# EAGLE board cmoy-wide (EAGLE 6.4)
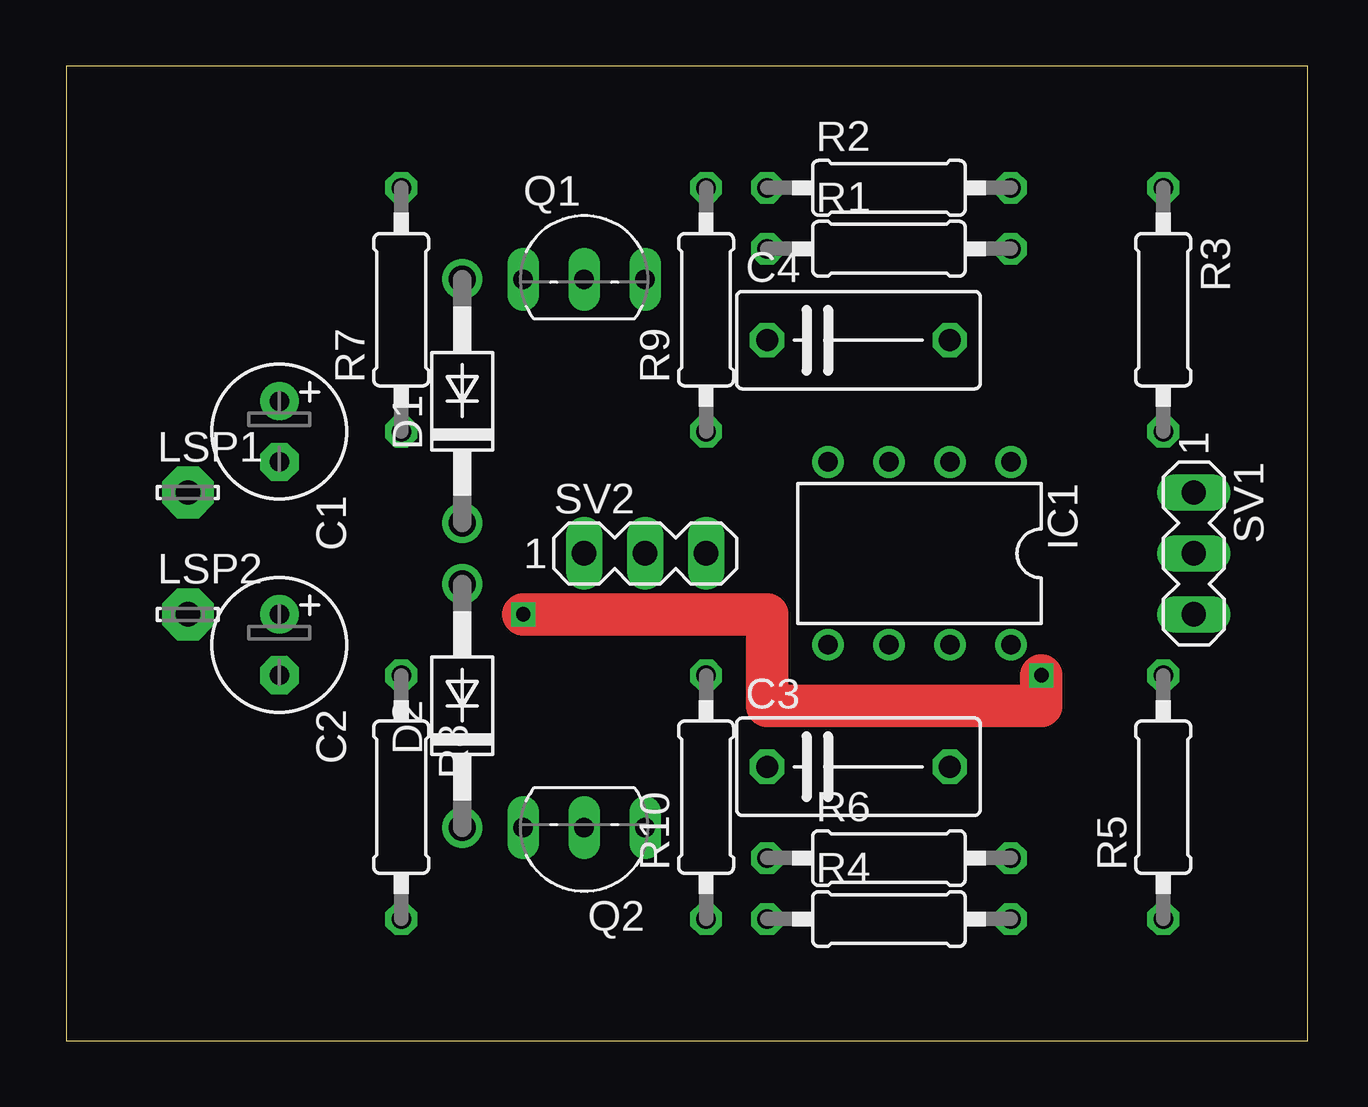
[diagram p0: board, top side]
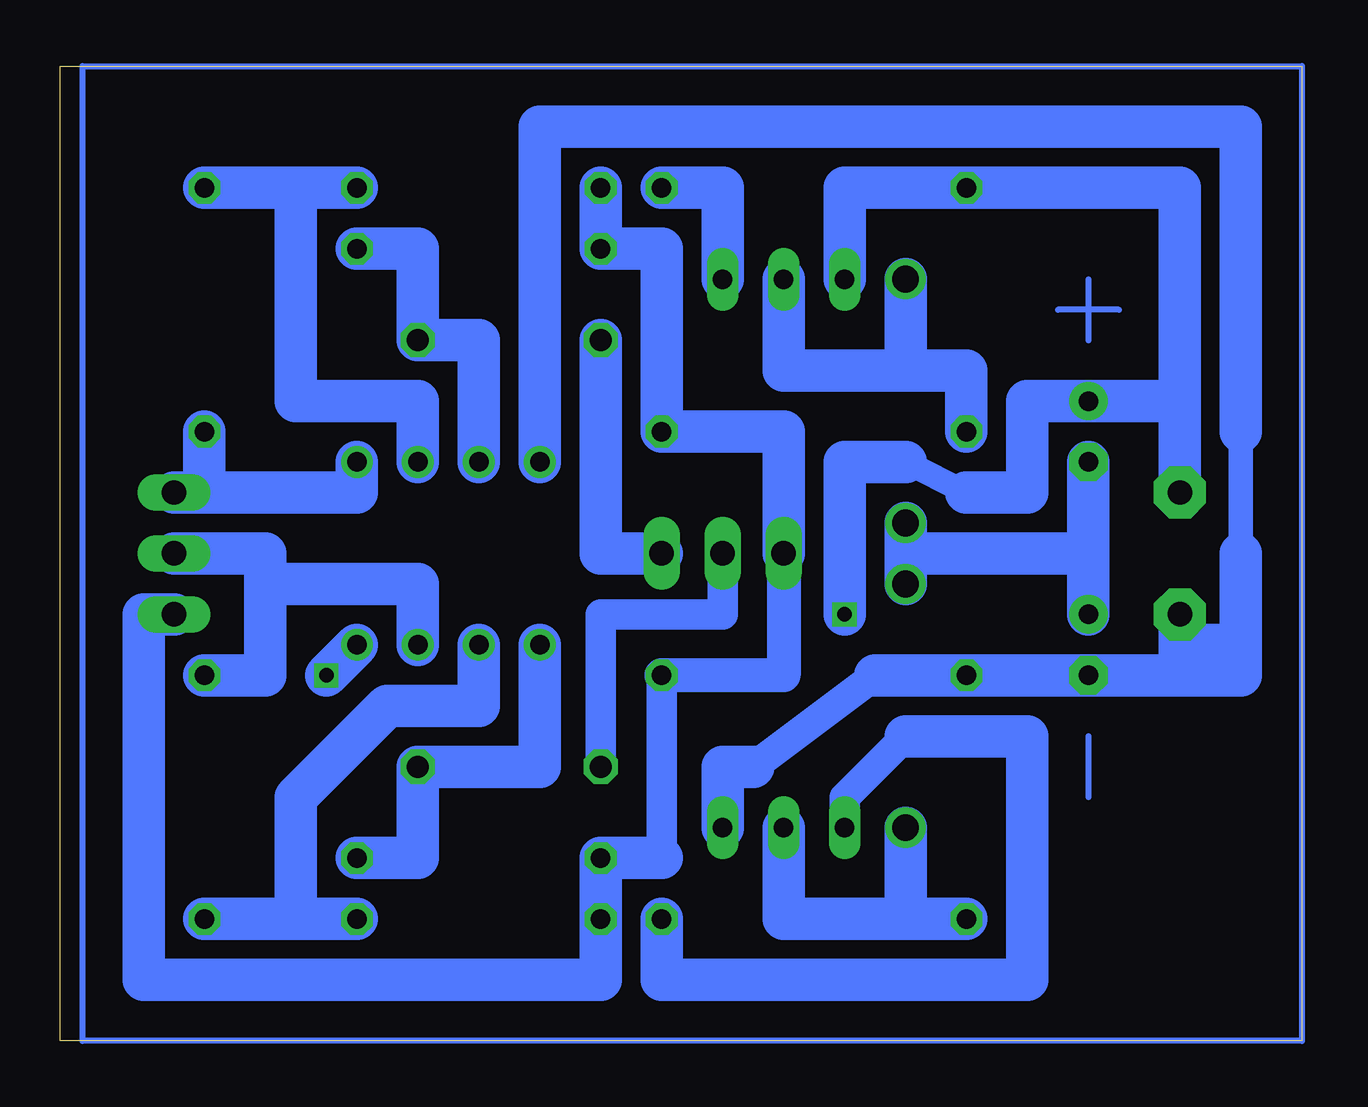
[diagram p1: board, bottom side, seen from below]

Size 51.74 x 40.63 mm. Coordinates in mm from the lower left corner, seen from the top.
Outline: 0,0 51.74,0 51.74,40.63 0,40.63 0,0
Copper layers (1*16): Top 0.035mm / dielectric 1.5mm / Bottom 0.035mm
Design rules "default *": minimum track width 10mil, minimum drill 24mil, track to track 8mil, track to pad 8mil, pad to pad 8mil, via to via 8mil, smd to smd 8mil, copper to edge 40mil, drill to drill 8mil, minimum pad ring 10mil, minimum via ring 8mil, stop-mask expansion 4mil, vias tented up to drill 0mil, thermal gap 10mil

## Footprints (pad centres in the part's own frame; a part is rotated, then mirrored left to right if it is on the bottom)
E2,5-6 = drill 0.813 pad 1.6: + -1.27,0 | drill 0.813 pad 1.6 octagon: - 1.27,0
C075-042X103 = drill 0.914 octagon: 1 -3.81,0; 2 3.81,0
DO41-10 = drill 1.118: A 5.08,0; C -5.08,0
DIL08 = drill 0.813 pad 1.27: 1 -3.81,-3.81; 2 -1.27,-3.81; 3 1.27,-3.81; 4 3.81,-3.81; 5 3.81,3.81; 6 1.27,3.81; 7 -1.27,3.81; 8 -3.81,3.81
LSP10 = drill 1.016 pad 2.159 octagon: MP 0,0
TO92-EBC = drill 0.813 long: B 0,-1.27; C -2.54,-1.27; E 2.54,-1.27
0207/10 = drill 0.813 octagon: 1 -5.08,0; 2 5.08,0
MA03-1 = drill 1.016 long: 1 -2.54,0; 2 0,0; 3 2.54,0

## Placement (x,y rotation side)
C1  220u  [E2,5-6]  8.89,25.4 270 top
C2  220u  [E2,5-6]  8.89,16.51 270 top
C3  0.1u  [C075-042X103]  33.02,11.43 0 top
C4  0.1u  [C075-042X103]  33.02,29.21 0 top
D1  1N4004  [DO41-10]  16.51,26.67 90 top
D2  1N4004  [DO41-10]  16.51,13.97 90 top
IC1  TL072P  [DIL08]  35.56,20.32 180 top
LSP1  LSP10  [LSP10]  5.08,22.86 0 top
LSP2  LSP10  [LSP10]  5.08,17.78 0 top
Q1  BC548  [TO92-EBC]  21.59,33.02 0 top
Q2  BC556  [TO92-EBC]  21.59,7.62 180 top
R1  100k  [0207/10]  34.29,33.02 0 top
R2  1k  [0207/10]  34.29,35.56 0 top
R3  10k  [0207/10]  45.72,30.48 270 top
R4  1k  [0207/10]  34.29,5.08 0 top
R5  10k  [0207/10]  45.72,10.16 90 top
R6  100k  [0207/10]  34.29,7.62 0 top
R7  4.7k  [0207/10]  13.97,30.48 90 top
R8  4.7k  [0207/10]  13.97,10.16 270 top
R9  10  [0207/10]  26.67,30.48 90 top
R10  10  [0207/10]  26.67,10.16 90 top
SV1  [MA03-1]  46.99,20.32 270 top
SV2  [MA03-1]  24.13,20.32 0 top

## Library data of the parts
C1-C4 R9 R10 = resistor
D1 D2 = diode
IC1 = linear
LSP1 LSP2 = solpad
Q1 = transistor-npn
Q2 = transistor-pnp
R1-R8 = rcl
SV1 SV2 = con-lstb; OC_FARNELL: unknown; OC_NEWARK: unknown

## Nets
GND: C2.- IC1.4 LSP2.MP Q2.C R8.1
N$2: C1.- C2.+ D1.C D2.A
N$3: D2.C Q2.B R8.2
N$5: D1.A Q1.B R7.1
N$8: R1.1 R2.1 R4.1 R6.1 R9.1 R10.2 SV1.3 SV2.1
N$9: Q1.E R9.2
N$10: Q2.E R10.1
N$11: IC1.2 R2.2 R3.1
N$12: IC1.1 R3.2 SV1.1
N$13: C4.2 IC1.3 R1.2
N$14: C4.1 SV2.3
N$16: IC1.7 R5.2 SV1.2
N$17: IC1.6 R4.2 R5.1
N$18: C3.2 IC1.5 R6.2
N$19: C3.1 SV2.2
VCC: C1.+ IC1.8 LSP1.MP Q1.C R7.2

## Tracks (layer width: path | path; a pad name or v marks a point on that pad's centre or on a via)
GND
  Bottom 1.016: 2.54,20.32 2.54,25.4
  Bottom 1.27: 17.78,15.24 22.86,11.43
  Bottom 1.778: 5.08,15.24 C2.- R8.1 17.78,15.24 | IC1.4 31.75,38.1 2.54,38.1 2.54,25.4 | 22.86,11.43 24.13,11.43 Q2.C | LSP2.MP 5.08,16.51 | 5.08,16.51 5.08,15.24 | 2.54,16.51 2.54,15.24 5.08,15.24 | 2.54,16.51 2.54,20.32 | 5.08,16.51 2.54,16.51
N$1
  Bottom 0.25: 8.89,12.7 8.89,10.16
N$2
  Bottom 1.778: D2.A 16.51,20.32 | 16.51,20.32 D1.C | 8.89,20.32 C2.+ | C1.- 8.89,20.32 | 8.89,20.32 16.51,20.32
N$3
  Bottom 1.778: 16.51,5.08 R8.2 | D2.C 16.51,5.08 | 16.51,5.08 21.59,5.08 Q2.B
N$4
  Bottom 0.25: 0,40.64 0,0 50.8,0 50.8,40.64 0,40.64
N$5
  Bottom 1.778: R7.1 13.97,27.94 16.51,27.94 | 16.51,27.94 D1.A | 16.51,27.94 21.59,27.94 Q1.B
N$6
  Bottom 0.25: 8.89,31.75 8.89,29.21
N$7
  Bottom 0.25: 7.62,30.48 10.16,30.48
N$8
  Bottom 0.406: R6.1 R4.1
  Bottom 1.27: R10.2 26.67,7.62
  Bottom 1.422: SV2.1 21.59,15.24 R10.2
  Bottom 1.778: SV2.1 21.59,25.4 R9.1 26.67,33.02 R1.1 R2.1 | 26.67,7.62 R6.1 29.21,2.54 48.26,2.54 48.26,17.78 SV1.3
N$9
  Bottom 1.778: Q1.E 24.13,35.56 R9.2
N$10
  Bottom 1.27: Q2.E 19.05,10.16 16.51,12.7
  Bottom 1.778: 16.51,12.7 11.43,12.7 11.43,2.54 26.67,2.54 R10.1
N$11
  Bottom 1.778: IC1.2 36.83,26.67 41.91,26.67 41.91,35.56 R2.2 R3.1
N$12
  Bottom 1.778: IC1.1 39.37,22.86 45.72,22.86 | 45.72,22.86 SV1.1 | R3.2 45.72,22.86
N$13
  Bottom 1.778: IC1.3 34.29,29.21 C4.2 36.83,33.02 R1.2
N$14
  Bottom 1.778: SV2.3 29.21,20.32 C4.1
N$16
  Bottom 1.778: IC1.7 36.83,19.05 43.18,19.05 | R5.2 43.18,15.24 43.18,19.05 | SV1.2 43.18,20.32 43.18,19.05
N$17
  Bottom 1.778: R4.2 41.91,5.08 | 41.91,5.08 R5.1 | IC1.6 34.29,13.97 38.1,13.97 41.91,10.16 41.91,5.08
N$18
  Bottom 1.778: IC1.5 31.75,11.43 C3.2 36.83,7.62 R6.2
N$19
  Bottom 1.27: SV2.2 24.13,17.78 29.21,17.78 C3.1
VCC  (via drill 0.6)
  Top 1.778: v40.64,15.24 40.64,13.97 29.21,13.97 29.21,17.78 v19.05,17.78
  Bottom 1.016: 13.97,22.86 16.51,24.13
  Bottom 1.778: 5.08,26.67 5.08,35.56 R7.2 19.05,35.56 Q1.C | 5.08,26.67 C1.+ 11.43,26.67 11.43,22.86 13.97,22.86 | 16.51,24.13 19.05,24.13 v19.05,17.78 | IC1.8 v40.64,15.24 | LSP1.MP 5.08,26.67